# EAGLE board barduino (EAGLE 6.4)
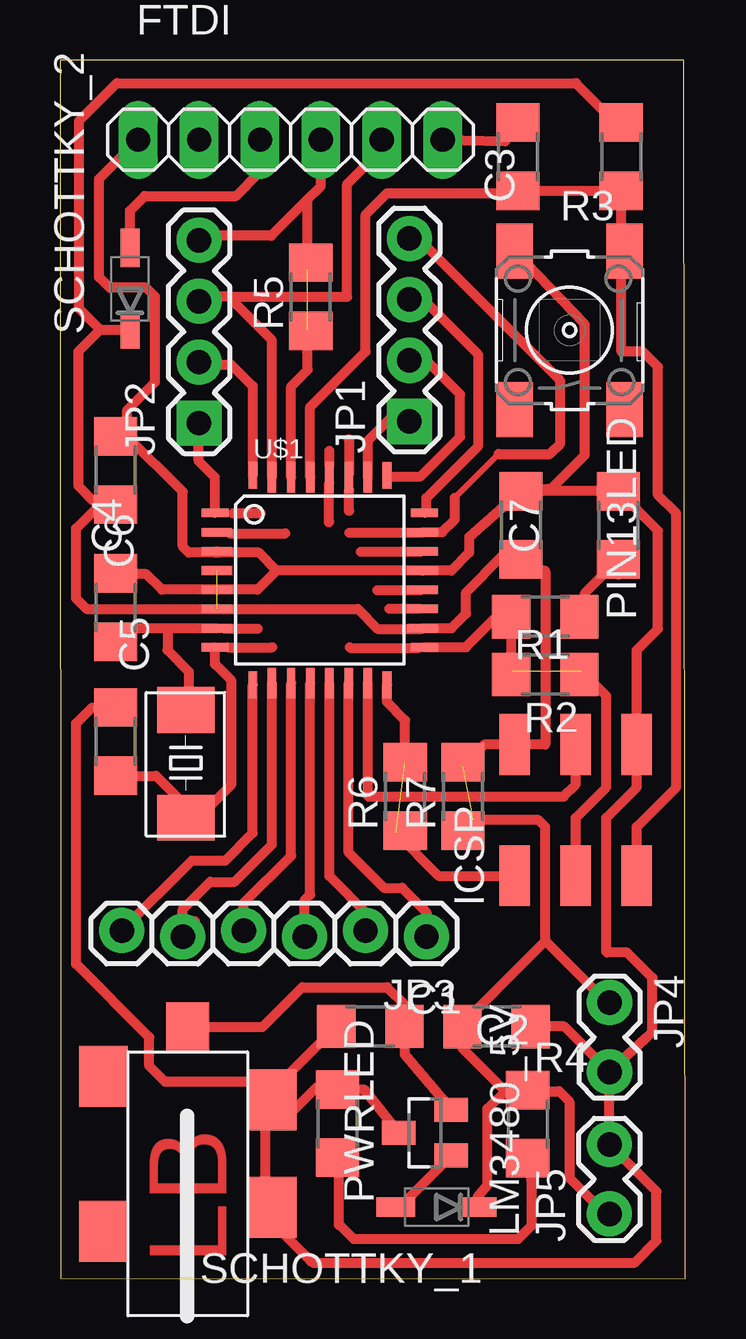
[diagram p0: board, top side]

Size 26.06 x 50.79 mm. Coordinates in mm from the lower left corner, seen from the top.
Outline: 0.03,0.01 26.06,0 26,50.79 0,50.79 0.03,0.01
Copper layers (1*16): Top 0.035mm / dielectric 1.5mm / Bottom 0.035mm
Design rules "default *": minimum track width 10mil, minimum drill 24mil, track to track 8mil, track to pad 8mil, pad to pad 8mil, via to via 8mil, smd to smd 8mil, copper to edge 40mil, drill to drill 8mil, minimum pad ring 12mil, minimum via ring 8mil, stop-mask expansion 4mil, vias tented up to drill 0mil, thermal gap 10mil
Net classes: 0 default: width 0.635 mm, clearance 0.406 mm; 1 power: width 0.635 mm, clearance 0.406 mm

## Footprints (pad centres in the part's own frame; a part is rotated, then mirrored left to right if it is on the bottom)
1206 = smd 1.6 x 1.803: 1 -1.422,0; 2 1.422,0
1X06 = drill 1.016 long: 1 -6.35,0; 2 -3.81,0; 3 -1.27,0; 4 1.27,0; 5 3.81,0; 6 6.35,0
2X03SMD = smd 2.54 x 1.27: 1 -2.54,2.54; 2 2.92,2.54; 3 -2.54,0; 4 2.92,0; 5 -2.54,-2.54; 6 2.92,-2.54
JACK_.65MM = smd 2.032 x 2.54: CONTACT 3.578,4.026; SHIELD -3.45,-1.448; SHIELD1 3.578,-0.447; SHUNT -3.45,5.005 | smd 1.778 x 2.032: PIN 0.064,7.071
1X04 = drill 1.016 pad 1.88 square: 1 0,0 | drill 1.016 pad 1.88: 2 2.54,0; 3 5.08,0; 4 7.62,0
1X06_LOCK = drill 1.016 pad 1.88: 1 0,0; 2 2.54,-0.254; 3 5.08,0; 4 7.62,-0.254; 5 10.16,0; 6 12.7,-0.254
1X02_LOCK = drill 1.016 pad 1.88: 1 -0.178,0; 2 2.718,0
SOT23 = smd 1 x 1.4: 1 -0.95,-1.1; 2 0.95,-1.1; 3 0,1.1
CS10 = smd 1.905 x 2.388: P$1 -2.286,0; P$2 2.21,0
6MM_SWITCH = smd 2.286 x 1.524: 1 -3.302,2.286; 2 3.302,2.286; 3 -3.302,-2.286; 4 3.302,-2.286
SOD123 = smd 1.6 x 0.8: ANODE 1.7,0; CATHODE -1.7,0
TQFP32-08THIN = smd 1.118 x 0.356: 1 -4.369,2.8; 8 -4.369,-2.8; 17 4.369,-2.8; 24 4.369,2.8 | smd 1.27 x 0.356: 2 -4.293,2; 3 -4.293,1.2; 4 -4.293,0.4; 5 -4.293,-0.4; 6 -4.293,-1.2; 7 -4.293,-2; 18 4.293,-2; 19 4.293,-1.2; 20 4.293,-0.4; 21 4.293,0.4; 22 4.293,1.2; 23 4.293,2 | smd 0.356 x 1.118: 9 -2.8,-4.369; 16 2.8,-4.369; 25 2.8,4.369; 32 -2.8,4.369 | smd 0.356 x 1.27: 10 -2,-4.293; 14 1.2,-4.293; 15 2,-4.293; 26 2,4.293; 27 1.2,4.293; 31 -2,4.293 | smd 0.35 x 1.27: 11 -1.2,-4.293; 12 -0.4,-4.293; 13 0.4,-4.293; 28 0.4,4.293; 29 -0.4,4.293; 30 -1.2,4.293

## Placement (x,y rotation side)
C1  10uF  [1206]  12.94,10.51 0 top
C2  10uF  [1206]  18.2,10.5 180 top
C3  .1uF  [1206]  19.09,46.76 90 top
C4  18pF  [1206]  2.33,27.97 270 top
C5  18pF  [1206]  2.33,22.38 270 top
C6  .1uF  [1206]  2.33,33.68 270 top
C7  .1uF  [1206]  19.22,31.4 270 top
FTDI  [1X06]  9.61,47.47 0 top
ICSP  [2X03SMD]  21.5,19.33 90 top
J1  JACK.65MM  [JACK_.65MM]  5.26,3.42 0 top
JP1  [1X04]  14.57,35.73 90 top
JP2  [1X04]  5.8,35.66 90 top
JP3  [1X06_LOCK]  15.28,14.25 180 top
JP4  [1X02_LOCK]  22.92,11.33 270 top
JP5  [1X02_LOCK]  22.91,2.87 90 top
LM3480_5V  [SOT23]  15.22,6.08 90 top
PIN13LED  [1206]  23.28,31.4 90 top
PWRLED  [1206]  11.57,6.46 90 top
Q2  16MHz  [CS10]  5.25,21.49 90 top
R1  1K  [1206]  20.23,27.59 180 top
R2  0  [1206]  20.23,25.17 180 top
R3  1K  [1206]  23.4,46.76 90 top
R4  1K  [1206]  19.5,6.44 90 top
R5  0  [1206]  10.45,40.92 90 top
R6  0  [1206]  14.39,20.09 90 top
R7  0  [1206]  16.8,20.09 90 top
S1  [6MM_SWITCH]  21.25,39.53 90 top
SCHOTTKY_1  [SOD123]  15.71,2.98 180 top
SCHOTTKY_2  [SOD123]  2.92,41.25 90 top
U$1  ATMEGA88-THIN  [TQFP32-08THIN]  10.84,29.11 0 top

## Library data of the parts
C1-C7 J1 LM3480_5V PIN13LED PWRLED Q2 R1-R7 S1 = ng
FTDI = pinhead
ICSP U$1 = fab
JP1-JP5 = SparkFun
SCHOTTKY_1 SCHOTTKY_2 = 01_ng

## Nets
A0: JP1.4 U$1.23
A1: JP1.3 U$1.24
A2: JP1.2 U$1.25
A3: JP1.1 U$1.26
A4: U$1.27
A5: U$1.28
CONNECT [power]: FTDI.3 SCHOTTKY_2.ANODE
D0: FTDI.4 JP2.4 U$1.30
D1: FTDI.5 JP2.3 U$1.31
D2: JP2.2 U$1.32
D3: JP2.1 U$1.1
D4: U$1.2
D5: JP3.6 U$1.9
D6: JP3.5 U$1.10
D7: JP3.4 U$1.11
D8: JP3.3 U$1.12
D9: JP3.2 U$1.13
D10: JP3.1 U$1.14
GND [power]: C1.1 C2.1 C4.1 C5.1 C6.1 C7.1 FTDI.1 ICSP.6 J1.CONTACT JP4.2 JP5.2 LM3480_5V.3 PIN13LED.2 PWRLED.2 S1.2 U$1.3 U$1.5 U$1.21
MISO-D12: ICSP.1 U$1.16
MOSI-D11: ICSP.4 U$1.15
N$1 [power]: LM3480_5V.1 SCHOTTKY_1.ANODE
N$2: PWRLED.1 R4.1
N$3: C1.2 J1.PIN LM3480_5V.2
N$4: PIN13LED.1 R1.1
PB6: C4.2 Q2.P$2 U$1.7
PB7: C5.2 Q2.P$1 U$1.8
RESET: C3.1 ICSP.5 R3.1 S1.4 U$1.29
RTS#: C3.2 FTDI.6
SCK-D13: ICSP.3 R1.2 U$1.17
VCC [power]: C2.2 C6.2 C7.2 ICSP.2 JP4.1 JP5.1 R3.2 R4.2 SCHOTTKY_1.CATHODE SCHOTTKY_2.CATHODE U$1.4 U$1.6 U$1.18

## Tracks (layer width: path | path; a pad name or v marks a point on that pad's centre or on a via)
A0
  Top 0.254: 16.47,32.55 18.29,34.37
  Top 0.406: U$1.23 15.93,31.11 16.47,31.65 16.47,32.55 | JP1.4 14.82,43.46 20.86,37.42 20.86,34.79 20.44,34.37 18.29,34.37
A1
  Top 0.406: JP1.3 15.03,40.92 17.44,38.51 17.44,34.7 15.28,32.54 15.28,31.99 U$1.24
A2
  Top 0.406: JP1.2 15.15,38.38 16.68,36.86 16.68,35.08 15.03,33.43 13.69,33.43 U$1.25
A3
  Top 0.406: U$1.26 12.84,34.92 13.76,35.84 JP1.1
CONNECT
  Top 0.406: 8.32,47.49 FTDI.3 8.31,47.44 8.31,46.09 7.34,45.12 3.52,45.12 2.92,44.52 SCHOTTKY_2.ANODE
D0  (1 unrouted)
  Top 0.406: U$1.30 9.64,37.18 10.33,37.87 10.33,39.52 | 10.33,44.99 8.8,43.46 6.1,43.46 JP2.4 | 10.33,42.06 10.33,44.99 | 10.33,44.99 10.88,45.53 FTDI.4
D1
  Top 0.406: U$1.31 8.84,39.11 7.03,40.92 | 7.03,40.92 11.98,40.92 11.98,45.62 12.87,46.51 FTDI.5 | 7.03,40.92 6.1,40.92 JP2.3
D2
  Top 0.406: U$1.32 8.04,37.2 7.13,38.1 5.83,38.1 JP2.2
D3
  Top 0.406: U$1.1 6.47,33.39 5.79,34.07 5.79,35.82 JP2.1
D5
  Top 0.406: U$1.9 8.04,18.56 6.9,17.43 5.5,17.43 JP3.6
D6
  Top 0.406: U$1.10 8.84,18.09 7.28,16.54 6.26,16.54 5.12,15.39 JP3.5 5.63,14.89
D7
  Top 0.406: U$1.11 9.64,17.62 7.66,15.65 JP3.4
D8
  Top 0.406: U$1.12 10.44,16.01 10.2,15.78 JP3.3
D9
  Top 0.406: U$1.13 11.24,16.77 12.87,15.14 12.87,14.63 JP3.2
D10
  Top 0.406: U$1.14 12.04,17.75 13.5,16.28 14.26,16.28 15.28,15.27 JP3.1
GND
  Top 0.406: C7.1 PIN13LED.2 24.93,31.17 24.93,27.08 24.04,26.19 ICSP.6 | ICSP.6 24.04,21.36 | C4.1 2.35,29.36 3.6,29.36 4.25,28.71 U$1.5 8.24,28.71 9.04,29.51 | 9.04,29.51 U$1.21 16.32,29.51 17.06,30.25 17.06,30.91 C7.1 | 9.04,29.51 8.3,30.25 6.6,30.25 U$1.3 6.49,30.25 5.37,30.25 5.12,30.51 5.12,32.79 2.81,35.1 | 2.81,35.1 C6.1 | C5.1 1.34,23.8 0.68,23.14 0.68,13.11 3.72,10.06 3.72,8.86 4.37,8.22 8.06,8.22 J1.CONTACT | J1.CONTACT 8.91,6.76 | C7.1 20.51,32.95 21.88,34.32 21.88,39.78 S1.2 | ICSP.6 24.04,20.47 22.77,19.2 22.77,13.62 22.8,13.59 23.64,13.59 24.7,12.53 24.7,10.29 24.42,10.02 24.42,10.01 JP4.2 | JP5.2 JP4.2 | JP5.2 22.41,5.27 | 8.91,6.76 8.55,6.39 8.55,2.64 10.25,0.94 10.26,0.94 10.54,0.66 23.96,0.66 24.87,1.57 24.87,3.63 JP5.2 | 8.91,6.76 9.49,6.76 10.7,7.97 11.48,7.97 PWRLED.2 12.69,7.88 LM3480_5V.3 | J1.CONTACT 8.84,7.83 C1.1 | C2.1 21.02,10.5 JP4.2 | 2.81,35.1 2.81,36.21 3.96,37.36 3.96,40.93 3.6,41.29 2.08,41.29 1.63,41.74 1.63,45.84 FTDI.1
MISO-D12  (1 unrouted)
  Top 0.406: ICSP.1 15.79,16.79 14.01,18.57 | U$1.16 13.64,24.02 14.39,23.27 14.39,21.49
MOSI-D11
  Top 0.406: U$1.15 12.84,20.13 12.87,20.09 21,20.09 21.5,20.6 ICSP.4
N$1
  Top 0.406: SCHOTTKY_1.ANODE 14.45,2.89 14.45,3.26 LM3480_5V.1
N$2
  Top 0.406: 19.68,3.84 R4.1 19.68,4.83 19.68,2.22 19.11,1.65 12.25,1.65 11.66,2.24 11.63,2.24 11.63,4.98 PWRLED.1
N$3
  Top 0.406: J1.PIN 8.44,10.49 10.1,12.14 13.64,12.14 14.4,11.39 14.4,10.54 C1.2 14.37,9.35 LM3480_5V.2
N$4
  Top 0.406: 23.28,29.34 PIN13LED.1 21.91,28.6 R1.1
N$6
  Top 0.406: 15.03,28.7 13.24,28.7 13.23,28.68
N$7
  Top 0.406: 14.98,27.91 13.74,27.91
N$11
  Top 0.406: 12.55,30.29 15.02,30.29
N$12
  Top 0.406: 12.07,31.09 15.09,31.09
N$13
  Top 0.406: 12.05,32.88 12.05,32.01 12.04,32
N$14
  Top 0.406: 11.22,33.16 11.22,31.54 11.21,31.53
N$15
  Top 0.406: 12.06,33.55 12.06,34.96 12.04,34.98
N$16
  Top 0.406: 11.23,33.87 11.23,34.5
N$17
  Top 0.406: 6.87,27.09 8.26,27.09
N$18
  Top 0.406: 7.01,26.31 8.85,26.31
N$19
  Top 0.406: 7.08,31.06 9.4,31.06
N$20
  Top 0.406: 7.21,31.9 8.38,31.9
N$21
  Top 0.406: 14.97,26.29 12.11,26.29 12.09,26.3
PB6
  Top 0.406: 4.49,27.11 2.89,27.11 C4.2 | 4.49,27.11 U$1.7 | 4.49,27.11 4.49,26.19 5.37,25.3 5.37,23.83 Q2.P$2
PB7
  Top 0.406: U$1.8 6.47,25.61 7.15,24.92 7.15,20.6 5.76,19.2 | 5.76,19.2 Q2.P$1 | C5.2 4,20.96 5.76,19.2
RESET
  Top 0.406: U$1.29 10.44,36.33 12.74,38.64 12.74,44.35 13.63,45.24 18.94,45.24 C3.1 R3.1 23.4,42.7 23.28,42.7 S1.4 23.41,42.7 23.41,38.64 24.3,38.64 24.93,38 24.93,32.67 25.69,31.9 25.69,20.47 24.04,18.82 ICSP.5
RTS#
  Top 0.406: FTDI.6 18.56,47.4 C3.2
SCK-D13  (1 unrouted)
  Top 0.406: U$1.17 16.93,26.32 18.46,27.84 R1.2 18.81,25.33 18.84,25.3 | ICSP.3 21.5,19.2 22.77,20.47 22.77,24.28 21.76,25.3
VCC  (2 unrouted)
  Top 0.406: 1.82,32.41 0.68,31.27 0.68,28.35 1.11,27.91 U$1.6 12.42,27.91 13.25,27.08 15.1,27.08 U$1.18 16.33,27.11 16.93,27.71 16.93,28.6 18.46,30.13 19.07,30.13 C7.2 20.23,29.49 20.23,22.25 ICSP.2 17.69,22.25 16.8,21.36 | 1.82,32.41 2.17,32.41 C6.2 | JP4.1 22.36,11.95 20.37,13.94 20.37,13.95 20.28,14.04 | 20.28,14.04 | 20.24,14.08 20.28,14.04 | 20.24,14.08 20.24,18.82 19.95,19.11 17.24,19.11 16.8,18.67 | 20.24,14.08 16.78,10.63 C2.2 16.78,9.59 18.57,7.8 | 18.57,7.8 19.45,7.8 R4.2 | 20.23,7.88 19.52,7.88 R4.2 | JP5.1 22.75,2.69 21.23,4.21 21.23,7.4 20.82,7.81 19.55,7.81 R4.2 | SCHOTTKY_1.CATHODE 17.41,3.39 17.81,3.88 17.81,7.07 18.57,7.8 | 1.67,39.55 0.79,40.43 0.79,48.25 2.36,49.82 21.52,49.82 23.15,48.19 R3.2 | 1.67,39.55 SCHOTTKY_2.CATHODE | 1.82,32.41 1.39,32.41 0.77,33.04 0.77,38.66 1.67,39.55

## Text on the board
Top: LB